# Altium PCB PCB1.PcbDoc
Units mm, origin at the board's own origin, x right, y up, seen from the top; angles counter-clockwise.
Board outline 38.74 x 49.78 mm, 2 copper layers (Top Layer, Bottom Layer); 37 components, 37 nets, 175 pads, 45 vias.
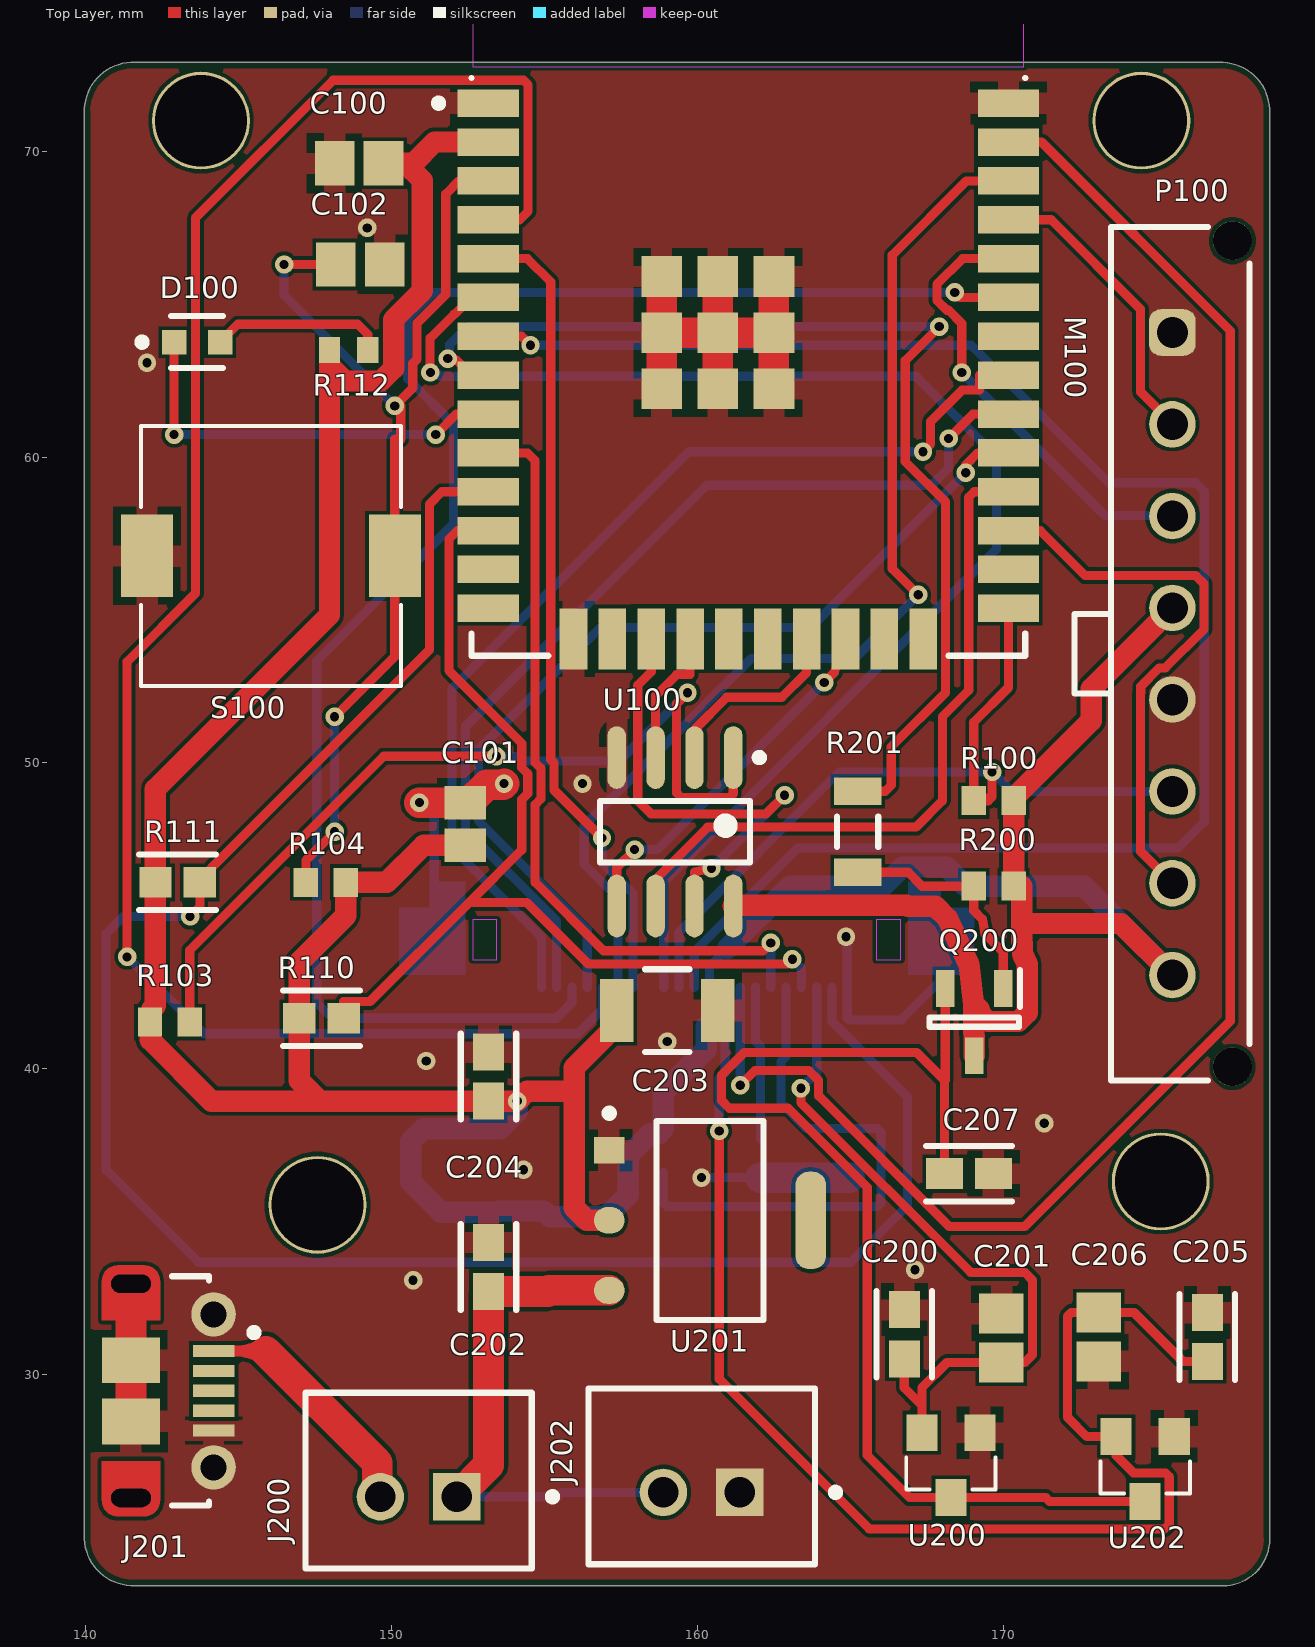
[diagram p0: Top Layer view]
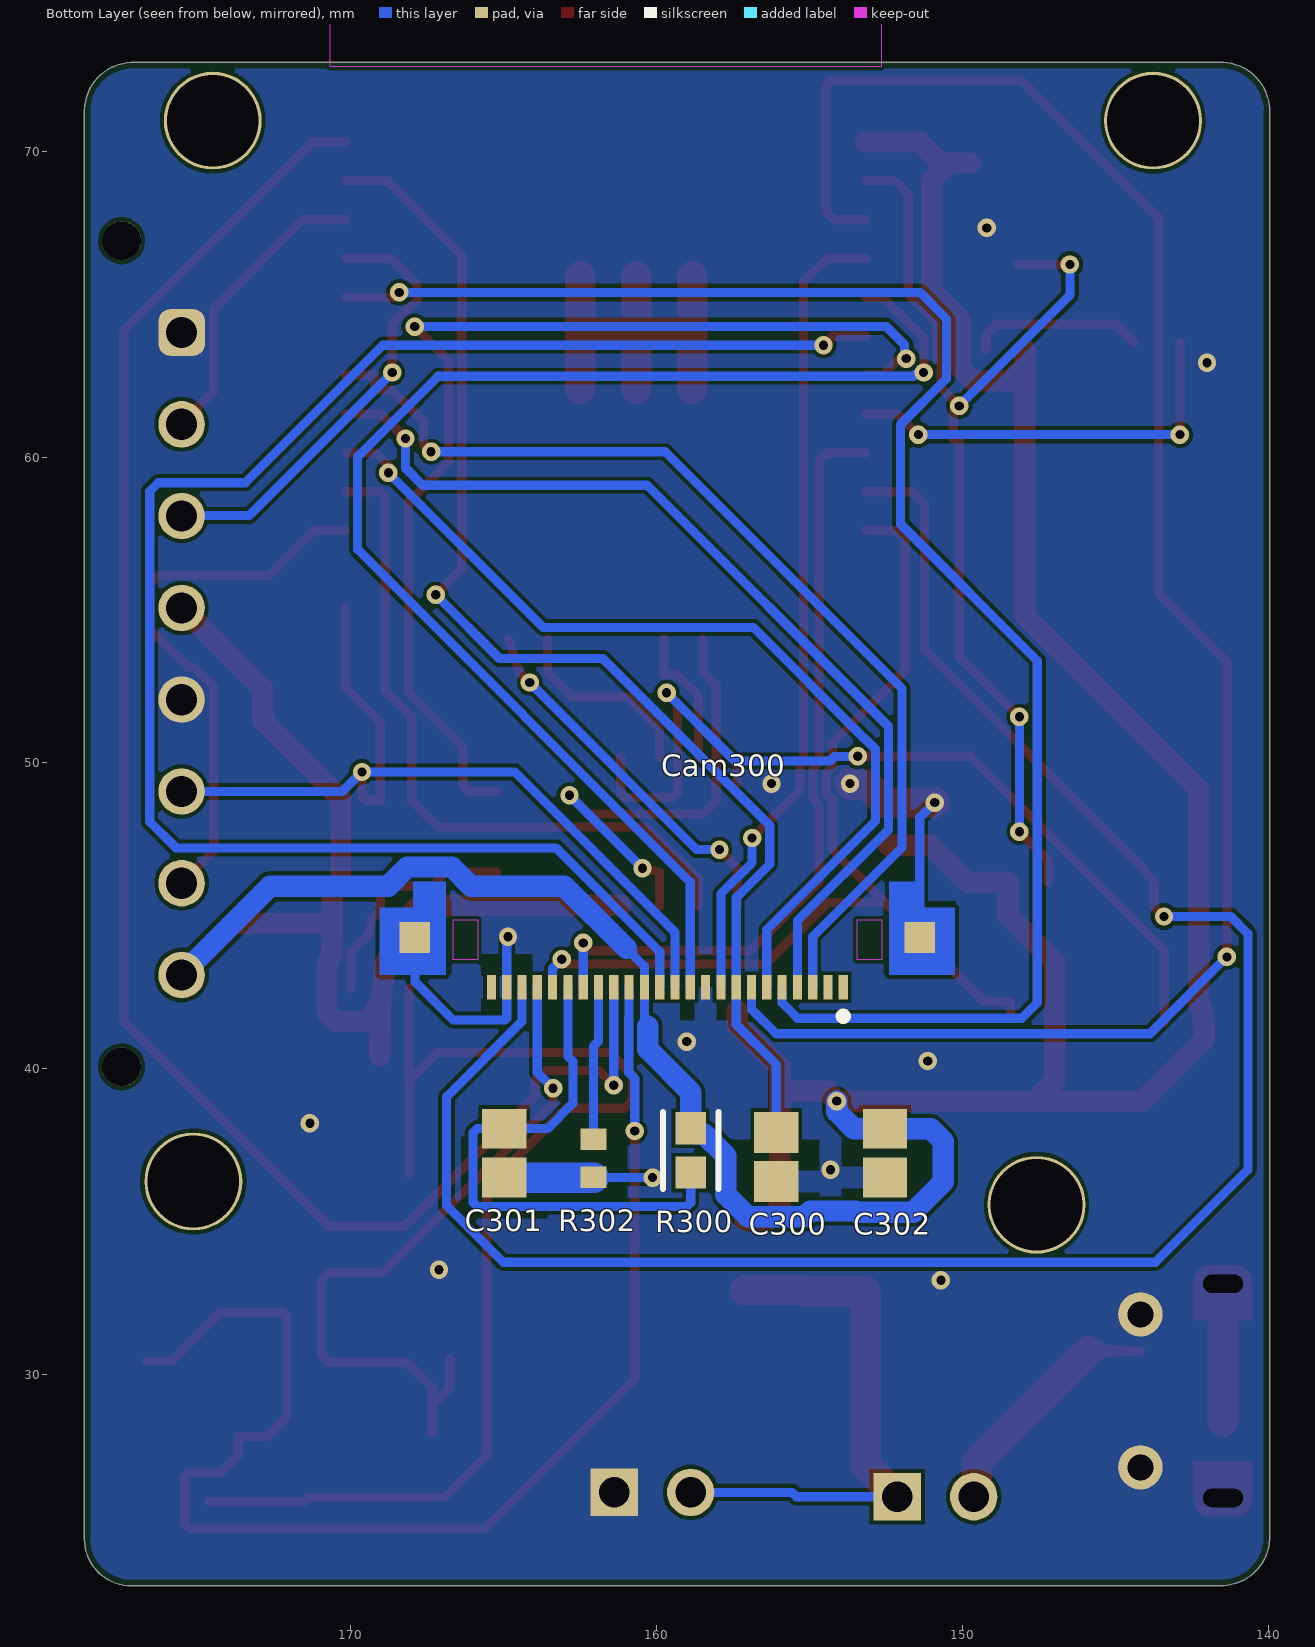
[diagram p1: Bottom Layer view, seen from below]
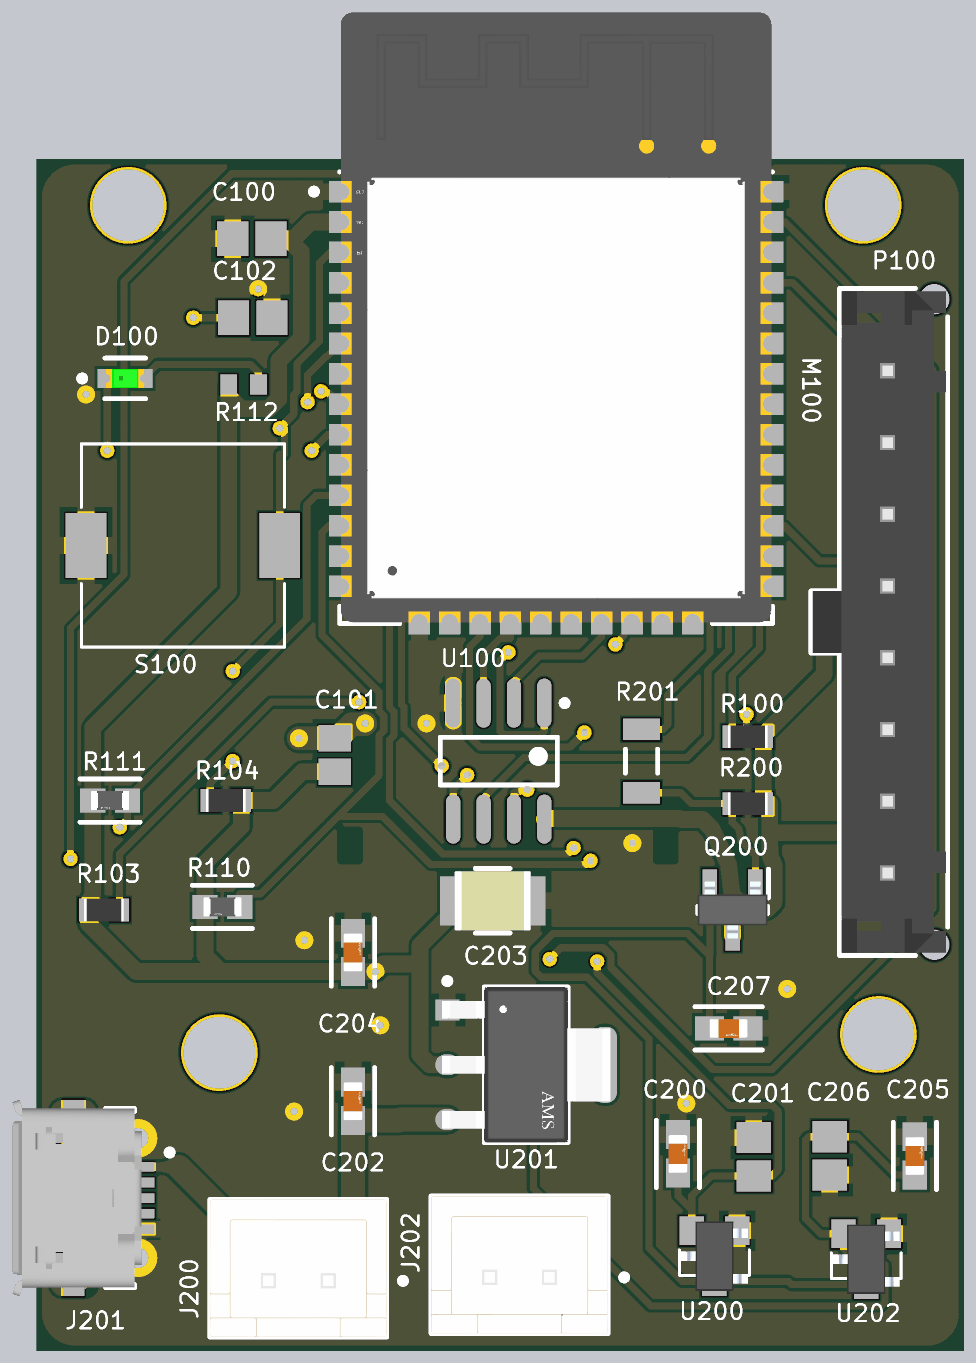
[diagram p2: 3D render of the assembled board from above, using the file's embedded part models]

## Layer stack, top to bottom
Top Solder: solder mask 0.0102, Solder Resist, Dk 3.5
Top Layer: signal copper 0.0356
Dielectric 1: dielectric 0.32, FR-4, Dk 4.8
Bottom Layer: signal copper 0.0356
Bottom Solder: solder mask 0.0102, Solder Resist, Dk 3.5

## Board outline
139.954,24.638 139.954,71.247 cw(c141.541,71.31) 141.478,72.898 177.038,72.898 cw(c177.101,71.31) 178.689,71.374 178.689,24.765 cw(c177.165,24.638) 177.292,23.114 141.605,23.114 cw(c141.541,24.701)

## Design rules (kind name [scope] priority, off if disabled: settings)
BoardOutlineClearance [All] p1: gap=0.2 ignorepadtopadclearanceinfootprint=FALSE
Clearance Clearance_3 [All] p1: gap=0.127 ignorepadtopadclearanceinfootprint=FALSE
Clearance Clearance_2 [All] p2: gap=0.254 ignorepadtopadclearanceinfootprint=FALSE
Clearance Clearance_1 [All] p3: gap=0.127 ignorepadtopadclearanceinfootprint=FALSE
Clearance [All] p4: gap=0.127 ignorepadtopadclearanceinfootprint=FALSE except(0.25: Arc-Hole Track-Hole SMDPad-Hole THPad-Hole Via-Hole Fill-Hole Poly-Hole Region-Hole Text-Hole)
ComponentClearance [All] p1: gap=0.127 collisioncheckmode=3 verticalgap=0.127 showdistances=TRUE
DiffPairsRouting [All] p1: maxlimit=0.254 minlimit=0.127 mostfreqgap=0.127 toplayer_minwidth=0.127 toplayer_maxwidth=25.4 toplayer_prefwidth=0.127 bottomlayer_minwidth=0.127 bottomlayer_maxwidth=25.4 bottomlayer_prefwidth=0.127 maxuncoupledlength=12.7
Height [All] p1: minheight=0 maxheight=1816.048 prefheight=12.7
HoleSize [All] p1: absolutevalues=TRUE maxlimit=6.3 minlimit=0.3 maxpercent=80.000 minpercent=20.000
HoleToHoleClearance [All] p1: gap=0.25 allowstackedmicrovias=FALSE
MinimumAnnularRing [All] p1: minimumring=0.076
MinimumSolderMaskSliver [All] p1: minsoldermaskwidth=0
PlaneClearance [All] p1: clearance=0.127
PlaneConnect PlaneConnectPowerPads [InPadClass('PowerPads')] p1: planeconnectstyle=Direct reliefexpansion=0.508 reliefentries=4 reliefconductorwidth=0.254 reliefairgap=0.254
PlaneConnect [All] p2: pad.planeconnectstyle=Relief pad.reliefexpansion=0.3 pad.reliefentries=4 pad.reliefconductorwidth=0.127 pad.reliefairgap=0.127 via.planeconnectstyle=Direct via.reliefexpansion=0.3 via.reliefentries=4 via.reliefconductorwidth=0.127 via.reliefairgap=0.127
PolygonConnect PolygonConnect_12 [All vs IsNamedPolygon('GND_L01_P002')] p1: thpad.connectstyle=Direct thpad.reliefconductorwidth=0.254 thpad.reliefentries=4 thpad.polygonreliefangle="90 Angle" thpad.airgapwidth=0.254 smdpad.connectstyle=Relief smdpad.reliefconductorwidth=0.7 smdpad.reliefentries=4 smdpad.polygonreliefangle="90 Angle" smdpad.airgapwidth=0.254 via.connectstyle=Direct via.reliefconductorwidth=0.254 via.reliefentries=4 via.polygonreliefangle="90 Angle" via.airgapwidth=0.254
PolygonConnect PolygonConnect_11 [All vs IsNamedPolygon('GND_L01_P002')] p2: thpad.connectstyle=Direct thpad.reliefconductorwidth=0.254 thpad.reliefentries=4 thpad.polygonreliefangle="90 Angle" thpad.airgapwidth=0.254 smdpad.connectstyle=Relief smdpad.reliefconductorwidth=0.7 smdpad.reliefentries=4 smdpad.polygonreliefangle="90 Angle" smdpad.airgapwidth=0.7 via.connectstyle=Direct via.reliefconductorwidth=0.254 via.reliefentries=4 via.polygonreliefangle="90 Angle" via.airgapwidth=0.254
PolygonConnect PolygonConnect_10 [All vs IsNamedPolygon('GND_L02_P003')] p3: thpad.connectstyle=Direct thpad.reliefconductorwidth=0.254 thpad.reliefentries=4 thpad.polygonreliefangle="90 Angle" thpad.airgapwidth=0.254 smdpad.connectstyle=Relief smdpad.reliefconductorwidth=0.7 smdpad.reliefentries=4 smdpad.polygonreliefangle="90 Angle" smdpad.airgapwidth=0.7 via.connectstyle=Direct via.reliefconductorwidth=0.254 via.reliefentries=4 via.polygonreliefangle="90 Angle" via.airgapwidth=0.254
PolygonConnect PolygonConnect_9 [All vs IsNamedPolygon('GND_L01_P002')] p4: thpad.connectstyle=Direct thpad.reliefconductorwidth=0.254 thpad.reliefentries=4 thpad.polygonreliefangle="90 Angle" thpad.airgapwidth=0.254 smdpad.connectstyle=Relief smdpad.reliefconductorwidth=0.254 smdpad.reliefentries=4 smdpad.polygonreliefangle="90 Angle" smdpad.airgapwidth=0.254 via.connectstyle=Direct via.reliefconductorwidth=0.254 via.reliefentries=4 via.polygonreliefangle="90 Angle" via.airgapwidth=0.254
PolygonConnect PolygonConnect_8 [All vs IsNamedPolygon('GND_L02_P003')] p5: thpad.connectstyle=Direct thpad.reliefconductorwidth=0.254 thpad.reliefentries=4 thpad.polygonreliefangle="90 Angle" thpad.airgapwidth=0.254 smdpad.connectstyle=Relief smdpad.reliefconductorwidth=0.254 smdpad.reliefentries=4 smdpad.polygonreliefangle="90 Angle" smdpad.airgapwidth=0.254 via.connectstyle=Relief via.reliefconductorwidth=0.254 via.reliefentries=4 via.polygonreliefangle="90 Angle" via.airgapwidth=0.254
PolygonConnect PolygonConnect_7 [All vs IsNamedPolygon('GND_L01_P002')] p6: thpad.connectstyle=Direct thpad.reliefconductorwidth=0.254 thpad.reliefentries=4 thpad.polygonreliefangle="90 Angle" thpad.airgapwidth=0.254 smdpad.connectstyle=Relief smdpad.reliefconductorwidth=0.254 smdpad.reliefentries=4 smdpad.polygonreliefangle="90 Angle" smdpad.airgapwidth=0.254 via.connectstyle=Relief via.reliefconductorwidth=0.254 via.reliefentries=4 via.polygonreliefangle="90 Angle" via.airgapwidth=0.254
PolygonConnect PolygonConnect_6 [All vs IsNamedPolygon('GND_L02_P003')] p7: thpad.connectstyle=Relief thpad.reliefconductorwidth=0.254 thpad.reliefentries=4 thpad.polygonreliefangle="90 Angle" thpad.airgapwidth=0.254 smdpad.connectstyle=Relief smdpad.reliefconductorwidth=0.7 smdpad.reliefentries=4 smdpad.polygonreliefangle="90 Angle" smdpad.airgapwidth=0.254 via.connectstyle=Relief via.reliefconductorwidth=0.254 via.reliefentries=4 via.polygonreliefangle="90 Angle" via.airgapwidth=0.254
PolygonConnect PolygonConnect_5 [All vs IsNamedPolygon('GND_L02_P003')] p8: thpad.connectstyle=Direct thpad.reliefconductorwidth=0.254 thpad.reliefentries=4 thpad.polygonreliefangle="90 Angle" thpad.airgapwidth=0.254 smdpad.connectstyle=Relief smdpad.reliefconductorwidth=0.254 smdpad.reliefentries=4 smdpad.polygonreliefangle="90 Angle" smdpad.airgapwidth=0.254 via.connectstyle=Relief via.reliefconductorwidth=0.254 via.reliefentries=4 via.polygonreliefangle="90 Angle" via.airgapwidth=0.254
PolygonConnect PolygonConnect_4 [All vs IsNamedPolygon('GND_L02_P003')] p9: thpad.connectstyle=Relief thpad.reliefconductorwidth=0.254 thpad.reliefentries=4 thpad.polygonreliefangle="90 Angle" thpad.airgapwidth=0.254 smdpad.connectstyle=Relief smdpad.reliefconductorwidth=0.7 smdpad.reliefentries=4 smdpad.polygonreliefangle="90 Angle" smdpad.airgapwidth=0.254 via.connectstyle=Relief via.reliefconductorwidth=0.254 via.reliefentries=4 via.polygonreliefangle="90 Angle" via.airgapwidth=0.7
PolygonConnect PolygonConnect_3 [All vs IsNamedPolygon('GND_L02_P003')] p10: thpad.connectstyle=Relief thpad.reliefconductorwidth=0.7 thpad.reliefentries=4 thpad.polygonreliefangle="90 Angle" thpad.airgapwidth=0.7 smdpad.connectstyle=Relief smdpad.reliefconductorwidth=0.7 smdpad.reliefentries=4 smdpad.polygonreliefangle="90 Angle" smdpad.airgapwidth=0.7 via.connectstyle=Relief via.reliefconductorwidth=0.254 via.reliefentries=4 via.polygonreliefangle="90 Angle" via.airgapwidth=0.254
PolygonConnect PolygonConnect_2 [All vs IsNamedPolygon('GND_L01_P002')] p11: thpad.connectstyle=Relief thpad.reliefconductorwidth=0.7 thpad.reliefentries=4 thpad.polygonreliefangle="90 Angle" thpad.airgapwidth=0.7 smdpad.connectstyle=Relief smdpad.reliefconductorwidth=0.7 smdpad.reliefentries=4 smdpad.polygonreliefangle="90 Angle" smdpad.airgapwidth=0.7 via.connectstyle=Relief via.reliefconductorwidth=0.254 via.reliefentries=4 via.polygonreliefangle="90 Angle" via.airgapwidth=0.254
PolygonConnect PolygonConnect_1 [All vs IsNamedPolygon('GND_L01_P002')] p12: thpad.connectstyle=Relief thpad.reliefconductorwidth=0.254 thpad.reliefentries=4 thpad.polygonreliefangle="90 Angle" thpad.airgapwidth=0.254 smdpad.connectstyle=Relief smdpad.reliefconductorwidth=0.7 smdpad.reliefentries=4 smdpad.polygonreliefangle="90 Angle" smdpad.airgapwidth=0.254 via.connectstyle=Relief via.reliefconductorwidth=0.254 via.reliefentries=4 via.polygonreliefangle="90 Angle" via.airgapwidth=0.254
PolygonConnect PolygonConnectPowerPads [All vs (InPadClass('PowerPads'))] p13: connectstyle=Direct reliefconductorwidth=0.254 reliefentries=4 polygonreliefangle="90 Angle" airgapwidth=0.254
PolygonConnect [All] p14: thpad.connectstyle=Relief thpad.reliefconductorwidth=0.127 thpad.reliefentries=4 thpad.polygonreliefangle="90 Angle" thpad.airgapwidth=0.127 smdpad.connectstyle=Relief smdpad.reliefconductorwidth=0.127 smdpad.reliefentries=4 smdpad.polygonreliefangle="90 Angle" smdpad.airgapwidth=0.127 via.connectstyle=Direct via.reliefconductorwidth=0.127 via.reliefentries=4 via.polygonreliefangle="90 Angle" via.airgapwidth=0.127
RoutingVias [All] p1: holewidth=0.3 width=0.6 viastyle="Through Hole" minholewidth=0.3 minwidth=0.6 maxholewidth=0.6 maxwidth=6.6
SilkToSilkClearance [All] p1: silktosilkclearance=0
SilkToSolderMaskClearance [IsPad] p1: minsilkscreentomaskgap=0.127 clearancetoexposedcopper=TRUE
SolderMaskExpansion [All] p1: expansion=0.075 istentingtop=FALSE
Width [All] p1: maxlimit=1 minlimit=0.127 preferedwidth=0.3
20 further rules are at their usual default settings.

## Classes and differential pairs
component class U_Power_Supply: C200 C201 C202 C203 C204 C205 C206 C207 J200 J201 J202 Q200 R200 R201 U200 U201 U202
component class U_MCU: C100 C101 C102 D100 K100 LED100 LED101 P100 R100 R103 R104 R110 R111 R112 S100 U100
component class U_Camera: C300 C301 C302 Cam300 R300 R301 R302

## Components (designator, comment, footprint, x,y, rotation, side; value= is the part's Value field where it differs from the comment)
C100 "08055C104K4Z2A" CAPC2013X140X50NL20T25 148.933,69.596 r0 top
C101 "C0805C105K4PACTU" CAPC2013X145X50LL20T25 152.4,48.006 r270 top
C102 "08055C104K4Z2A" CAPC2013X140X50NL20T25 148.971,66.294 r180 top
C200 "GRM188R60J106ME47D" FP-GRM188-0_1-e0_2_0_55-IPC_A 166.751,31.329 r90 top
C201 "08055C104K4Z2A" CAPC2013X140X50NL20T25 169.926,31.204 r270 top
C202 "GRM188R60J106ME47D" FP-GRM188-0_1-e0_2_0_55-IPC_A 153.162,33.528 r90 top
C203 "GRM32ER60J107ME20L" FP-GRM32-0_3-MFG 159.004,41.91 r0 top value=100uF
C204 "GRM188R60J106ME47D" FP-GRM188-0_1-e0_2_0_55-IPC_A 153.162,39.751 r90 top
C205 "GRM188R60J106ME47D" FP-GRM188-0_1-e0_2_0_55-IPC_A 176.657,31.242 r90 top
C206 "08055C104K4Z2A" CAPC2013X140X50NL20T25 173.101,31.242 r90 top
C207 "GRM188R60J106ME47D" FP-GRM188-0_1-e0_2_0_55-IPC_A 168.87,36.576 r0 top
C300 "08052U150GAT2A" CAPC2013X115X51NL20T26 156.083,37.122 r270 bottom
C301 "08055C104K4Z2A" CAPC2013X140X50NL20T25 164.973,37.249 r90 bottom
C302 "08055C104K4Z2A" CAPC2013X140X50NL20T25 152.527,37.249 r90 bottom
Cam300 "Cam-connector" MOLX-52435-2471 159.639,43.434 r0 bottom
D100 "LTST-C190GKT" FP-LTST-C190GKT-MFG 143.637,63.754 r0 top
J200 "B2B-XH-A(LF)(SN)" FP-B2B-XH-A_LF_SN-MFG 150.876,26.543 r180 top
J201 "105017-0001" USB-MICRO-B_V 142.828,29.48 r270 top
J202 "B2B-XH-A(LF)(SN)" FP-B2B-XH-A_LF_SN-MFG 160.127,26.687 r180 top
M100 "ESP32-WROOM-32" FP-ESP32-WROOM-32-MFG 161.655,66.305 r0 top
P100 "Header 8" 66200811122 175.769,53.57 r90 top
Q200 "FDN340P" SOT95P237X112-3N 169.037,41.529 r270 top
R100 "CRCW060310K0FKEA" RESC1609X50X30NL8T20 169.672,48.768 r0 top
R103 "CRCW060310K0FKEA" RESC1609X50X30NL8T20 142.748,41.529 r180 top
R104 "CRCW060310K0FKEA" RESC1609X50X30NL8T20 147.843,46.101 r0 top
R110 "ERA-3AEB472V" FP-ERA3A-IPC_B 147.701,41.656 r180 top
R111 "ERA-3AEB472V" FP-ERA3A-IPC_B 143.002,46.101 r180 top
R112 "ERJ-3EKF1001V" RESC1608X55X30LL15T15 148.59,63.5 r0 top
R200 "CRCW060310K0FKEA" RESC1609X50X30NL8T20 169.672,45.974 r0 top
R201 "ERJ-8ENF1001V" RESC3216X70X50LL05T20 165.227,47.752 r270 top
R300 "ERA-3AEB472V" FP-ERA3A-IPC_B 158.877,37.338 r90 bottom
R302 "ERJ-3EKF1001V" RESC1608X55X30LL15T15 162.052,37.084 r270 bottom
S100 "SKSTACE010" SW_SKSTACE010 146.05,56.769 r0 top value=RST
U100 "PSRAM" MCHP-SOIC-SN8_N 159.258,47.752 r270 top
U200 "PMIC-LDO-XC6206P332MR-G(SOT23)" SOT-23 168.275,27.051 r180 top
U201 "AMS1117-3.3" FP-AMS1117-IPC_C 160.401,35.052 r0 top
U202 "PMIC-LDO-XC6206P332MR-G(SOT23)" SOT-23 174.625,26.924 r180 top

## Footprints (in the part's own frame and the unit in brackets; to place one, negate y for a bottom-side part, rotate by r counter-clockwise, add the part's x,y. Pads: shape width x height; smd on the part's side, far side on the other; paste and mask are expansions set on the pad)
66200811122 [mm] "3.00mm Male Single Row Vertical Header, 8p"
  rrect50% 1.52x1.52 hole 1.02: 1(10.5,0.255)
  round 1.52 hole 1.02: 2(7.5,0.255) 3(4.5,0.255) 4(1.5,0.255) 5(-1.5,0.255) 6(-4.5,0.255) 7(-7.5,0.255) 8(-10.5,0.255)
  round 1.27 hole 1.27 unplated: MH1(-13.5,-1.705) MH2(13.5,-1.705)
  silkscreen extent -13.95,-2.26 13.95,3.46, body extent -13.82,-2.19 13.83,3.38, height 9.93
CAPC2013X115X51NL20T26 [mm] "Chip Capacitor, 2-Leads, Body 2.01x1.25mm, IPC Medium Density"
  rect 1.35x1.45 smd: 1(-0.8,0) 2(0.8,0)
  body extent -1.11,-0.72 1.1,0.72, height 1.15
CAPC2013X140X50NL20T25 [mm] "Chip Capacitor, 2-Leads, Body 2.00x1.25mm, IPC Medium Density"
  rect 1.3x1.45 smd: 1(-0.8,0) 2(0.8,0)
  body extent -1.1,-0.72 1.1,0.72, height 1.4
CAPC2013X145X50LL20T25 [mm] "Chip Capacitor, 2-Leads, Body 2.00x1.25mm, IPC High Density"
  rect 1.1x1.35 smd: 1(-0.7,0) 2(0.7,0)
  body extent -1.1,-0.72 1.1,0.72, height 1.45
FP-AMS1117-IPC_C [mm]
  rect 1.004x0.872 smd paste+0 mask+0: 1(-3.295,2.29)
  rrect100% 1.004x0.872 smd paste+0 mask+0: 2(-3.295,0) 3(-3.295,-2.29)
  rrect87% 1.004x3.182 smd paste+0 mask+0: 4(3.295,0)
  silkscreen extent -3.42,-3.25 1.75,3.62, body extent -3.9,-3.35 3.9,3.35, height 0.25
FP-B2B-XH-A_LF_SN-MFG [mm]
  rect 1.55x1.55 hole 1 paste-2539.97 mask+0: 1(-1.25,0.525)
  round 1.55 hole 1 paste-2539.97 mask+0: 2(1.25,0.525)
  silkscreen extent -4.5,-2.88 3.7,2.87, body extent -3.8,-2.98 3.8,2.98, height 0.25
FP-ERA3A-IPC_B [mm]
  rect 1.055x1.006 smd paste+0 mask+0: 1(-0.726,0) 2(0.726,0)
  silkscreen extent -1.25,-0.9 1.25,0.9, body extent -1.5,-0.75 1.5,0.75, height 0.25
FP-ESP32-WROOM-32-MFG [mm]
  rect 2x0.9 smd paste+0 mask+0: 1(-8.5,5.26) 2(-8.5,3.99) 3(-8.5,2.72) 4(-8.5,1.45) 5(-8.5,0.18) 6(-8.5,-1.09) 7(-8.5,-2.36) 8(-8.5,-3.63) 9(-8.5,-4.9) 10(-8.5,-6.17) 11(-8.5,-7.44) 12(-8.5,-8.71) 13(-8.5,-9.98) 14(-8.5,-11.25) 25(8.5,-11.25) 26(8.5,-9.98) 27(8.5,-8.71) 28(8.5,-7.44) 29(8.5,-6.17) 30(8.5,-4.9) 31(8.5,-3.63) 32(8.5,-2.36) 33(8.5,-1.09) 34(8.5,0.18) 35(8.5,1.45) 36(8.5,2.72) 37(8.5,3.99) 38(8.5,5.26)
  rect 0.9x2 smd paste+0 mask+0: 15(-5.715,-12.25) 16(-4.445,-12.25) 17(-3.175,-12.25) 18(-1.905,-12.25) 19(-0.635,-12.25) 20(0.635,-12.25) 21(1.905,-12.25) 22(3.175,-12.25) 23(4.445,-12.25) 24(5.715,-12.25)
  rect 1.33x1.33 smd paste+0 mask+0: 39(-2.835,-4.075) 39(-2.835,-2.24) 39(-2.835,-0.405) 39(-1,-4.075) 39(-1,-2.24) 39(-1,-0.405) 39(0.835,-4.075) 39(0.835,-2.24) 39(0.835,-0.405)
  Keep-Out Layer region: -9,6.45 9,6.45 9,12.75 -9,12.75
  Keep-Out Layer region: -9,6.45 9,6.45 9,12.75 -9,12.75
  silkscreen extent -10.25,-12.8 9.05,6.08, body extent -9.6,-13.35 9.6,12.9, height 0.25
FP-GRM32-0_3-MFG [mm]
  rect 1.1x2.05 smd paste+0 mask+0: 1(-1.65,0) 2(1.65,0)
  silkscreen extent -0.73,-1.35 0.73,1.35, body extent -2.3,-1.45 2.3,1.45, height 0.25
FP-GRM188-0_1-e0_2_0_55-IPC_A [mm]
  rect 1.208x1.012 smd paste+0 mask+0: 1(-0.802,0) 2(0.802,0)
  silkscreen extent -1.41,-0.91 1.41,0.91, body extent -1.91,-1.01 1.91,1.01, height 0.25
FP-LTST-C190GKT-MFG [mm]
  rect 0.8x0.8 smd paste+0 mask+0: 1(-0.75,0) 2(0.75,0)
  silkscreen extent -1.92,-0.85 0.85,0.85, body extent -1.25,-0.55 1.25,0.55, height 0.25
MCHP-SOIC-SN8_N [mm] "SOIC, 8-Leads, Body 4.9x3.9mm, Pitch 1.27mm, IPC Medium Density"
  oval 2.05x0.6 smd: 1(-2.425,1.905) 2(-2.425,0.635) 3(-2.425,-0.635) 4(-2.425,-1.905) 5(2.425,-1.905) 6(2.425,-0.635) 7(2.425,0.635) 8(2.425,1.905)
  silkscreen extent -2.55,-2.45 1,2.88, body extent -1.95,-2.45 1.95,2.45, height 1.75
MOLX-52435-2471 [mm] "FPC Connector, 24-Leads, Right Angle, Pitch 0.5 mm, Mated Height 2.0 mm, SMT"
  rect 0.3x0.8 smd: 1(-5.75,0.762) 2(-5.25,0.762) 3(-4.75,0.762) 4(-4.25,0.762) 5(-3.75,0.762) 6(-3.25,0.762) 7(-2.75,0.762) 8(-2.25,0.762) 9(-1.75,0.762) 10(-1.25,0.762) 11(-0.75,0.762) 12(-0.25,0.762) 13(0.25,0.762) 14(0.75,0.762) 15(1.25,0.762) 16(1.75,0.762) 17(2.25,0.762) 18(2.75,0.762) 19(3.25,0.762) 20(3.75,0.762) 21(4.25,0.762) 22(4.75,0.762) 23(5.25,0.762) 24(5.75,0.762)
  rect 1x1 smd: MP1(-8.25,-0.863) MP2(8.25,-0.863)
  Top Layer region: -7.244,0.362 -9.4,0.362 -9.4,-1.838 -8.3,-1.838 -8.3,-2.688 -7.244,-2.688
  Top Layer region: 7.239,0.362 9.4,0.362 9.4,-1.838 8.3,-1.838 8.3,-2.688 7.239,-2.688
  Keep-Out Layer region: -7,-0.137 -6.2,-0.137 -6.2,-1.438 -7,-1.438
  Keep-Out Layer region: 6.2,-0.137 7,-0.137 7,-1.438 6.2,-1.438
  silkscreen extent -5.87,1.59 -5.62,1.84, body extent -9.3,-5.74 9.3,0.86, height 2.05
RESC1608X55X30LL15T15 [mm] "Chip Resistor, 2-Leads, Body 1.60x0.80mm, IPC High Density"
  rect 0.7x0.85 smd: 1(-0.625,0) 2(0.625,0)
  body extent -0.87,-0.48 0.87,0.48, height 0.55
RESC1609X50X30NL8T20 [mm] "Chip Resistor, 2-Leads, Body 1.65x0.95mm, IPC Medium Density"
  rect 0.8x0.95 smd: 1(-0.65,0) 2(0.65,0)
  body extent -0.82,-0.48 0.82,0.48, height 0.5
RESC3216X70X50LL05T20 [mm] "Chip Resistor, 2-Leads, Body 3.20x1.60mm, IPC High Density"
  rect 0.9x1.55 smd: 1(-1.325,0) 2(1.325,0)
  silkscreen extent -0.5,-0.67 0.5,0.67, body extent -1.63,-0.82 1.62,0.82, height 0.7
SOT95P237X112-3N [mm]
  rect 1.2x0.6 smd: 1(-1.1,0.95) 2(-1.1,-0.95) 3(1.1,0)
  silkscreen extent -1.7,-1.46 0.15,1.5, body extent -1.18,-1.46 1.18,1.46, height 1.12
SOT-23 [mm]
  rect 1.016x1.2 smd: 1(-0.95,-1.06) 2(0.95,-1.06) 3(0,1.06)
  silkscreen extent -1.46,-0.25 1.46,0.8, body extent -1.4,-1.45 1.4,1.45, height 1.3
SW_SKSTACE010 [mm]
  rect 1.7x2.7 smd: 1(-4.05,0) 2(4.05,0)
  silkscreen extent -4.25,-4.25 4.25,4.25
USB-MICRO-B_V [mm] "USB, MICRO B, Body 7.491x4.695 mm, Pitch 0.65 mm"
  rect 0.4x1.35 smd: 1(-1.3,1.35) 2(-0.65,1.35) 3(0,1.35) 4(0.65,1.35) 5(1.3,1.35)
  round 1.45 hole 0.85: 6(-2.5,1.35) 7(2.5,1.35)
  rrect50% 0x0 hole 0.6 slot 1.3 at 90 deg: 8(-3.5,-1.35) 11(3.5,-1.35)
  rect 1.5x1.9 smd: 9(-1,-1.35) 10(1,-1.35)
  Top Layer circle w0.5: c3.6,-0.9 r0.25
  Top Layer region: -2.3,-2.3 -2.3,-0.4 -3.6,-0.4 -3.6,-2.3
  Top Layer region: 2.3,-0.4 2.3,-2.3 3.6,-2.3 3.6,-0.4
  Top Layer region: 3.6,-0.9 3.6,-1.8 4.1,-1.8 4.1,-0.9
  Top Layer region: -3.6,-1.8 -3.6,-0.9 -4.1,-0.9 -4.1,-1.8
  Top Layer lines w0.5: 3.6,-1.55 cw(c3.6,-1.8) 3.426,-1.979 cw(c3.6,-1.8) 3.6,-1.55 ; 3.6,-1.55 ccw(c3.6,-1.8) 3.6,-1.55 ; -3.6,-1.55 ccw(c-3.6,-1.8) -3.6,-1.55 ; -3.53,-1.14 ccw(c-3.6,-0.9) -3.5,-1.129 ccw(c-3.6,-0.9) -3.362,-0.977 ccw(c-3.6,-0.9) -3.355,-0.951 ccw(c-3.6,-0.9) -3.6,-0.65 ccw(c-3.6,-0.9) -3.53,-1.14
  silkscreen extent -3.75,-0.01 3.75,2.79, body extent -4.1,-3.9 4.1,1.5, height 2.67

## Part data
C100 C102 C201 C206 C301 C302: library part CMP-2007-04629-1, Manufacturer="AVX Interconnect / Elco", Parameter 1=0.1uf, Part Number=08055C104K4Z2A
C101: library part CMP-1036-04746-2, Manufacturer=Kemet, Parameter 1=1uF, Part Number=C0805C105K4PACTU
C200 C202 C204 C205 C207: library part CMP-2006-02792-2, "Chip Multilayer Ceramic Capacitors for General Purpose, 0603, 10uF, X5R, 15%, 20%, 6.3V", Capacitance=10uF, Case Code (Imperial)=0603, Case Code (Metric)=1608, Dielectric=X5R, Max Operating Temperature=85°C, Min Operating Temperature=-55°C, Package Quantity=4000, Tolerance=20%, Voltage=6.3V, Case/Package=0603, Depth=0.8mm, Height=0.8mm, Lead Free="Lead Free", Length=1.6mm, Material=Ceramic, Mount="Surface Mount", Packaging="Tape and Reel", Radiation Hardening=No, REACH SVHC="No SVHC", Termination=SMD/SMT, Thickness=0.035inch, Voltage Rating=6.3V, Voltage Rating (DC)=6.3V, Width=0.031inch
C203: library part CMP-2000-05259-2, "CAP CER 100UF 6.3V X5R 1210", 3DS Part Number=220-00002, Capacitance=100uF, Manufacturer=Murata, Package=GRM32-0.3, Temperature="-55°C to +85°C", Temperature Characteristic=X5R, Temperature Coefficient=15%, Temperature Range High=+85°C, Temperature Range Low=-55°C, Tolerance=20%, Voltage=6.3V, Automotive=No, Category=Cap, ComponentLink2Description=Datasheet, ComponentLink2URL=https://search.murata.co.jp/Ceramy/image/img/A01X/G101/ENG/GRM32ER60J107ME20-01.pdf, Device Class L1="Passive Components", Device Class L2=Capacitors, Device Class L3="Ceramic Capacitors", Digikey Description="CAP CER 100UF 6.3V X5R 1210", Height=2.7mm, Ipc Land Pattern Name=CAPC320250X250, Lead Free=Yes, Manufacturer Part Number=GRM32ER60J107ME20L, Material=Ceramic, Octopart=https://octopart.com/grm32er60j107me20l-murata-197007, RoHS=TRUE, Voltage Rating=6.3V
C300: library part CMP-2007-04886-1, Manufacturer="AVX Interconnect / Elco", Parameter 1=15pf, Part Number=08052U150GAT2A
Cam300: library part CMP-1241-00275-1, "0.5 mm Pitch Easy-On(TM) Type FPC Connector, 2.0 mm Mated Height, Right Angle, ZIF, SMT, Top Contact, 24 Circuits, -40 to 85 degC, ELV and RoHS Compliant, Tape and Reel", Current (Max per Contact)=0.5A, Manufacturer=Molex, PartNumber=52435-2471, Voltage (Max)="50V AC (RMS)/DC", Circuits (Loaded)=24, ComponentLink1Description="Manufacturer URL", ComponentLink1URL=http://www.molex.com/molex/index.jsp, ComponentLink2Description=Datasheet, ComponentLink2URL=http://www.molex.com/webdocs/datasheets/pdf/en-us/0524352471_FFC_FPC_CONNECTORS.pdf, ComponentLink3Description="Package Specification", ComponentLink3URL=http://www.molex.com/pdm_docs/sd/524352471_sd.pdf, Contact Position=Top, Durability (mating cycles max)=20, Entry Angle="90degrees Angle", Mated Height=2.00mm, Material - Metal="Phosphor Bronze", Material - Plating Mating=Gold, Material - Plating Termination=Gold, Mounting Technology="Surface Mount", Number of Rows=1, Orientation="Right Angle", PackageDescription="24-Lead FPC Connector, Pitch 0.5 mm", PackageReference=52435-2471, PackageVersion="Rev. D, 07/2010", Packing="Tape and Reel", PCB Locator=No, PCB Retention=Yes, Pitch - Mating Interface=0.50mm, Polarized to PCB=Yes, RoHS=TRUE, Stackable=No
D100: library part CMP-22017-000005-2, "LED GREEN CLEAR CHIP SMD", Case Code (Imperial)=0603, Case Code (Metric)=1608, Color=Green, Forward Current=30mA, Forward Voltage=2.1V, Lens Color=Colorless, Max Operating Temperature=85°C, Min Operating Temperature=-55°C, Package Quantity=1, Power Dissipation=100mW, Reverse Voltage=5V, Test Current=10mA, Voltage=2V, Case/Package=0603, Depth=0.8mm, Dominant Wavelength=569nm, Height=0.8mm, Illumination Color=Green, Lead Free="Lead Free", Length=1.6mm, Lens Style=Clear, Lens Transparency=Clear, Luminous Intensity=6mcd, Mount="Surface Mount", Number of Elements=1, Number of LEDs=1, Number of Pins=2, Packaging="Tape and Reel", Parameter 1=LED, Power Rating=100mW, Radiation Hardening=No, Viewing Angle=130°, Wavelength=565nm, Width=0.8mm
J200 J202: library part CMP-2000-05888-3, "CONN HEADER VERT 2POS 2.5MM", Color=Natural, Contact Resistance=20mR, Current Rating=3A, Housing Color=White, Insulation Resistance=1GR, Max Operating Temperature=85°C, Max Voltage Rating (AC)=250V, Min Operating Temperature=-25°C, Connector Type="Male Pin", Contact Material=Brass, Contact Plating=Tin, Contact Type="Male Pin", Depth=5.75mm, Fastening Type=Detent, Housing Material=Polyamide, Lead Free="Lead Free", Lead Pitch=2.5mm, Length=7.4mm, Max Current Rating=3A, Max Voltage Rating (DC)=250V, Mount="Through Hole", Number of Contacts=2, Number of Positions=2, Number of Rows=1, Orientation=Straight, Packaging=Bulk, Pitch=2.5mm, REACH SVHC="No SVHC", Series=XH, Termination=Solder, Voltage Rating=250V, Voltage Rating (AC)=250V, Wire/Cable Gauge=22AWG
  J200: Parameter 1=Switch
  J202: Parameter 1=Potentiometer
J201: library part CMP-2000-05827-1, "Micro-USB B Receptacle, Right Angle, Bottom Mount, Surface Mount, with Solder Tabs, -30 to 85 degC, 5-Pin USB, RoHS, Tape and Reel", Manufacturer=Molex, Package Description="5-Leads USB, Micro B, Body 7.5 x 5 mm, Pitch 0.65 mm", Package Reference=MICRO-B, Package Version="Rev. F, 12/2012", Standard Package=1, Voltage - Max=30V, 3D Model=105017-0001.stp, Catalog Drawings=1050170001, Category=Connectors,Interconnects, Circuits=5, Connector Type=USB-microB, Datasheet URL=http://www.molex.com/elqNow/elqRedir.htm?ref=http://www.molex.com/webdocs/datasheets/pdf/en-us/1050170001_IO_CONNECTORS.pdf, Datasheet Version=03/2016, Family=USB,DVI,HDMIConnectors, Featured Product=Micro-USBConnectorsUSBConnectors, Features=Shielded,SolderRetention, Gender=Receptacle, Ingress Protection=-, Manufacturer URL=http://www.molex.com/, Mating Products=WM17145-ND-CABLEMICROUSBBTOSTDA1.0MWM17147-ND-CABLEMICROUSBBTOSTDA2.0MWM17146-ND-CABLEMICROUSBBTOSTDA1.5M, Mounting Technology=SurfaceMount, Mounting Type=BoardCutout,SurfaceMount,RightAngle, Number of Contacts=5, Online Catalog=Molex-MicroUSB, Other Names=WM1399DKR, Package URL=http://www.molex.com/pdm_docs/sd/1050170001_sd.pdf, Packaging=Digi-Reel®, PCN Assembly/Origin=ResinSupplier21/Oct/2015, RoHS Information=1050170001CertofCompliance, Series=-, Specifications=-
M100: library part CMP-194065-000008-1, "RX TXRX MOD WIFI SURFACE MOUNT", Case/Package=SMD/SMT, Frequency=2.5GHz, Max Operating Temperature=85°C, Min Operating Temperature=-40°C, Operating Supply Voltage=3.6V, Package Quantity=550, Data Rate=150Mbps, Mount="Surface Mount", Packaging="Cut Tape", Sensitivity=-98dBm, Weight=0.088185oz
P100: library part CMP-1502-00446-2, Color=Black, Contact Resistance=10mΩ, Current Rating=5A, Insulation Resistance=1GΩ, Max Operating Temperature=105°C, Min Operating Temperature=-40°C, Operating Supply Voltage=250V, Connector Type="Male Pin, Socket", Contact Material=Copper, Contact Plating=Tin, Fastening Type=Ramp, Gender=Male, Height=11mm, Lead Pitch=3mm, Length=27.65mm, Mount="Through Hole", NexarPartId=23024701, Number of Contacts=8, Number of Pins=8, Number of Positions=8, Number of Rows=1, Orientation=Vertical, Pitch=3mm, REACH SVHC=Unknown, RoHS=Compliant, Termination="Kinked Pin", Width=27.65mm
Q200: "MOSFET (P-Channel)", Manufacturer_Name=onsemi, Mouser Part Number=512-FDN340P, Arrow Part Number=FDN340P, Arrow Price/Stock=https://www.arrow.com/en/products/fdn340p/on-semiconductor?region=nac, Datasheet Link=https://www.onsemi.com/pub/Collateral/FDN340P-D.PDF, Height=1.12mm, Manufacturer_Part_Number=FDN340P, Mouser Price/Stock=https://www.mouser.co.uk/ProductDetail/onsemi-Fairchild/FDN340P?qs=AMp2PTjoga9dhzFXRaqTZw%3D%3D, Parameter 1=PMOS
R100 R103 R104 R200: library part CMP-1666-00005-4, "Chip Resistor, 10 KOhm, +/- 1%, 100 mW, -55 to 155 degC, 0603 (1608 Metric), RoHS, Tape and Reel", Manufacturer="Vishay Semiconductor", Max Operating Temperature="155 degC", Min Operating Temperature="-55 degC", Package Quantity=5000, Voltage Rating="75 V", ComponentLink1Description="Manufacturer URL", ComponentLink1URL=http://www.vishay.com/, ComponentLink2Description=Datasheet, ComponentLink2URL=https://datasheet.ciiva.com/11809/0900766b80d98afc-11809037.pdf, DatasheetVersion=06/2012, Height="0.45 mm", Length="1.55 mm", Mounting Technology="Surface Mount", PackageDescription="2-Pin Surface Mount Device, Body 1.575 x 0.85 mm", PackageReference=0603, Packaging="Tape and Reel", Parameter 1=10k, REACH SVHC=Unknown, RoHSCompliant=true
R110 R111 R300: library part CMP-2000-00072-2, "RES SMD 4.7K OHM 0.1% 1/10W 0603", Case Code (Imperial)=0603, Case Code (Metric)=1608, Max Operating Temperature=155°C, Max Power Dissipation=100mW, Min Operating Temperature=-55°C, Package Quantity=5000, Resistance=4.7kR, Resistance Tolerance=0.1%, Resistor Type="Thin Film", Temperature Coefficient=25ppm/°C, Voltage Rating=75V, Case/Package=0603, Construction=Rectangular, Contact Plating=Tin, Depth=0.8mm, Height=0.45mm, Lead Free="Lead Free", Length=1.6mm, Military Standard=Not, Mount="Surface Mount", Number of Pins=2, Number of Terminations=2, Packaging="Tape and Reel", Power Rating=100mW, Radiation Hardening=No, REACH SVHC="No SVHC", RoHS Compliant=Yes, Series=ERA-3A, Technology="THIN FILM", Termination=SMD/SMT, Tolerance=0.1%, Voltage Rating (DC)=75V, Width=0.8mm, Working Voltage=75V
R112 R302: library part CMP-2000-00180-1, Manufacturer=Panasonic, Parameter 1=1k, Part Number=ERJ-3EKF1001V
R201: library part CMP-2003-00017-1, Manufacturer=Panasonic, Parameter 1=1k, Part Number=ERJ-8ENF1001V
S100: "Switch Tactile N.O. SPST Round Button J-Bend 0.05A 16VDC 500000Cycles 4N SMD T/R", Package=None, Availability=Unavailable, MP=SKSTACE010, Price=None
U100: library part CMP-0163-00041-1, "512K bits SPI Serial SRAM with SDI and SQI Interface, 2.5 to 5.5 V, 20 MHz, -40 to 85 degC, 8-pin SOIC (SN8), Tube", Manufacturer=Microchip, PartNumber=23LC512-I/SN, ComponentLink1Description="Manufacturer URL", ComponentLink1URL=http://www.microchip.com, ComponentLink2Description=Datasheet, ComponentLink2URL=http://ww1.microchip.com/downloads/en/DeviceDoc/25155A.pdf, ComponentLink3Description="Package Specification", ComponentLink3URL=http://www.microchip.com/stellent/groups/techpub_sg/documents/packagingspec/en012702.pdf, ComponentLink4Description="Product URL", ComponentLink4URL=http://www.microchip.com/23LC512, DatasheetVersion="Rev. A", Mounting Technology="Surface Mount", PackageDescription="8-Lead Plastic Small Outline, 4.9 x 3.9 mm Body, 1.27 mm Pitch", PackageReference=SOIC-SN8, PackageVersion=C04-057C
U200 U202: "Linear Voltage Regulator IC Positive Fixed 1 Output 200mA SOT-23", Package="SOT-23-3 Torex", Availability="In Stock", Check_prices=https://www.snapeda.com/parts/XC6206P332MR-G/Torex/view-part/?ref=eda, MF=Torex, MP=XC6206P332MR-G, Price=None, Purchase-URL=https://pricing.snapeda.com/search/part/XC6206P332MR-G/?ref=eda, SnapEDA_Link=https://www.snapeda.com/parts/XC6206P332MR-G/Torex/view-part/?ref=snap
  U200: Parameter 1=XC6206-2.8V
  U202: Parameter 1=XC6206-1.2V
U201: library part CMP-209535-000001-1, "LDO Voltage Regulators 1A, 3.3V", Dropout Voltage=1.1V, Manufacturer="Advanced Monolithic Systems", Max Junction Temp=+125°C, Max Power Dissipation=1.2W, Max Supply Voltage=15V, Nominal Supply Current=5mA, Output Current=1A, Output Voltage=3.3V, Package=AMS1117, Temperature="-40°C to +125°C", Temperature Range Low=-40°C, Automotive=No, Category=IC, ComponentLink2Description=Datasheet, ComponentLink2URL=http://www.advanced-monolithic.com/pdf/ds1117.pdf, Device Class L1="Integrated Circuits (ICs)", Device Class L2="Power Management ICs", Device Class L3="Voltage Regulators - Linear", Height=1.8mm, Ipc Land Pattern Name=SOT229P700X180-4, Lead Free=Yes, Manufacturer Part Number=AMS1117-3.3, Number of Outputs=1, Octopart=https://octopart.com/ams1117-3.3-advanced+monolithic+systems-25899300, Output Type=Fixed, RoHS=TRUE, Standoff Height=0.64mm, Temperature Range High=+125°C

## Free pads (board coordinates)
  round 3.2 hole 3: 13(143.764,70.993) 14(147.574,35.56) 15(175.133,36.322) 16(174.498,70.993)

## Via types
v1: diameter 0.6, hole 0.3, Top Layer to Bottom Layer, 45 vias

## Nets (pads, with @x,y where several pads share a name; then routed paths per layer and width w, separated by ;. In a path a pad name is that pad's centre, name@x,y a point inside that pad or via, vN(x,y) a via of type N, cw(c..) or ccw(c..) an arc to the next point about the centre after c; other vN are vias at no path point)
3V3: C100.2 C101.2 C203.1 C204.1 C302.2 Cam300.14 M100.2 P100.4 P100.8 Q200.3 R100.2 R103.2 R104.2 R110.2 R111.2 R112.1 R200.2 R300.2 U100.8 U201.2 | length 149.3
  Top Layer w0.7: R112.1 147.965,62.992 ; C100.2 150.444,69.596 ; C101.2 151.04,47.306 149.835,46.101 R104.2 148.493,45.009 146.975,43.491 R110.2 146.975,39.624 147.65,38.949 ; M100.2 151.397,70.295 150.698,69.596 150.444,69.596 ; U201.2 156.374,35.052 155.964,35.462 155.964,39.267 ; C203.1 157.354,41.435 155.964,40.045 155.964,39.267 ; U100.8 161.184,45.349 166.837,45.349 166.871,45.314 167.767,45.314 168.177,44.904 168.864,43.427 169.013,42.137 ; Q200.3 169.018,41.829 169.013,42.137 ; P100.8 173.829,44.755 170.586,44.755 ; P100.4@175.514,55.087 P100.4 172.865,52.421 172.865,51.386 170.322,48.843 R200.2 170.586,45.974 170.586,44.755 ; 147.65,38.949 C204.1 v1(154.102,38.949) 154.42,39.267 155.964,39.267 ; 147.65,38.949 144.109,38.949 142.098,40.96 R103.2 142.148,41.579 142.148,41.936 142.276,42.064 R111.2 142.276,49.149 147.965,54.838 147.965,62.992 ; 147.965,62.992 148.473,62.484 149.649,62.484 150.059,62.894 150.059,64.492 151.003,65.436 151.003,69.037 150.444,69.596 ; 169.013,42.137 169.21,41.94 169.21,41.831 169.489,41.552 170.485,41.552 170.764,41.831 170.764,43.427 170.614,43.765 170.614,44.075 170.586,44.175 170.586,44.755
  Bottom Layer w0.3: 160.389,41.517 160.389,43.358 160.782,43.751 160.782,43.942
  Bottom Layer w0.7: v1(154.102,38.949) 154.102,38.608 153.543,38.049 151.032,38.049 150.622,37.639 150.622,36.304 151.604,35.322 153.45,35.322 153.484,35.357 154.974,35.357 155.16,35.17 157.006,35.17 157.726,35.89 157.726,37.166 158.446,37.886 158.724,37.886 158.877,38.039 158.877,39.243 160.274,40.64 160.274,41.402 ; 160.973,43.942 163.005,45.974 166.055,45.974 166.68,46.599 168.137,46.599 168.762,45.974 172.627,45.974 P100.8@175.514,43.087
+5V: C202.1 J200.1 J202.2 U201.3 | length 17.9
  Top Layer w1: J200.1 153.162,27.054 C202.1 155.092,32.726 155.128,32.762 U201.3
  Bottom Layer w0.3: J200.1 155.423,26.018 155.567,26.162 J202.2
"CAM RST": C301.2 Cam300.19 R300.1 | length 18
  Bottom Layer w0.3: R300.1 158.877,35.636 159.004,35.509 165.862,35.509 165.989,35.636 165.989,37.922 165.862,38.049 C301.2 163.551,38.049 162.726,38.874 162.726,40.248 162.889,40.411 Cam300.19
"CSI D4": Cam300.7 M100.4 | length 61.1
  Top Layer w0.3: v1(141.351,43.663) 141.351,53.315 143.586,55.55 143.586,67.818 148.082,72.314 154.305,72.314 154.457,72.161 154.457,68.034 154.178,67.755 M100.4
  Bottom Layer w0.3: v1(141.351,43.663) 143.866,41.148 156.083,41.148 156.889,41.954 Cam300.7
"CSI D5": Cam300.9 M100.5 | length 26.5
  Top Layer w0.3: M100.5 154.432,66.485 155.194,65.723 155.194,50.109 155.301,50.002 155.301,49.118 v1(156.87,47.549)
  Bottom Layer w0.3: v1(156.87,47.549) 156.87,46.741 157.889,45.722 Cam300.9
"CSI MCLK": Cam300.12 M100.25 P100.6 R100.1 | length 29.2
  Top Layer w0.3: v1(169.621,49.708) 169.621,48.895 ; M100.25 170.155,52.466 169.022,51.333 R100.1 ; R100.1 169.494,48.768 169.621,48.895 ; R100.1 169.621,48.895
  Bottom Layer w0.3: Cam300.12 159.389,44.471 164.626,49.708 v1(169.621,49.708) 170.259,49.07 P100.6@175.54,49.07
CSI_1.2V: C205.1 C206.2 Cam300.15 U202.2 | length 44.3
  Top Layer w0.3: v1(160.706,37.973) 160.706,29.87 165.608,24.968 175.26,24.968 175.412,25.121 175.412,26.67 175.285,26.797 174.244,26.797 173.675,27.366 U202.2 172.72,27.984 172.085,28.619 172.085,31.915 172.212,32.042 C206.2 174.257,32.042 175.859,30.44 C205.1
  Bottom Layer w0.3: v1(160.706,37.973) 160.706,39.688 160.901,39.883 160.901,41.662 160.889,41.674 Cam300.15
CSI_2.8V: C200.1 C201.2 Cam300.21 U200.2 | length 23.7
  Top Layer w0.3: v1(163.373,39.37) 163.373,38.901 168.924,33.35 170.688,33.35 170.942,33.096 170.942,30.658 170.688,30.404 C201.2 168.148,30.404 167.325,29.581 167.325,29.007 ; C200.1 166.751,29.581 167.325,29.007 ; U200.2 167.325,29.007
  Bottom Layer w0.3: v1(163.373,39.37) 163.889,39.886 Cam300.21
"E32 RST": C102.2 M100.3 R104.1 S100.2 | length 34
  Top Layer w0.3: v1(146.482,66.294) C102.2 ; R104.1 147.193,46.812 v1(148.133,47.752) ; v1(148.133,51.511) 150.1,53.478 S100.2 150.1,60.579 150.292,60.579 150.292,61.671 v1(150.1,61.671) ; v1@150.196,61.767 150.686,62.257 150.686,63.056 150.826,63.196 150.826,64.372 151.765,65.311 151.765,68.593 152.197,69.025 M100.3
  Bottom Layer w0.3: v1(146.482,66.294) 146.482,65.289 v1(150.1,61.671) ; v1(148.133,47.752) v1(148.133,51.511)
GND: C100.1 C101.1 C102.1 C200.2 C201.1 C202.2 C203.2 C204.2 C205.2 C206.1 C207.2 C300.2 C301.1 C302.1 Cam300.10 Cam300.23 Cam300.MP1 Cam300.MP2 J201.5 J201.6 J201.7 J201.8 J201.9 J201.10 J201.11 J202.1 M100.1 M100.15 M100.38 M100.39 P100.1 P100.5 R302.2 S100.1 U100.4 U200.1 U201.1 U202.1 | length 40.9
  Top Layer w0.3: J201.11 141.698,25.978 142.16,25.973 ; U100.4@157.353,49.327 U100.4
  Top Layer w1: J201.10 J201.9 J201.8 ; v1(150.901,48.706) C101.1 152.525,48.706 153.111,49.292 153.635,49.292 v1(153.67,49.327) ; M100.39@158.82,62.23 M100.39@158.82,64.065 ; M100.39@158.82,65.9 M100.39@158.82,64.065 ; M100.39@160.655,62.23 M100.39@160.655,64.065 ; M100.39@160.655,65.9 M100.39@160.655,64.065 ; M100.39@162.49,62.23 M100.39@162.49,64.065 ; M100.39@162.49,65.9 M100.39@162.49,64.065 ; M100.39@158.82,64.065 M100.39@160.655,64.065 ; M100.39@160.655,64.065 M100.39@162.49,64.065
  Bottom Layer w0.3: v1(150.901,48.706) 151.389,48.218 Cam300.MP1 ; v1(160.122,36.449) R302.2@162.052,36.449 ; v1(164.846,44.323) 164.889,44.28 164.889,41.664 164.948,41.605 166.649,41.605 167.889,42.845 Cam300.MP2
  Bottom Layer w1: R302.2@162.052,36.449 C301.1
  other v1: 150.698,33.096 167.101,33.435 154.305,36.703 171.323,38.227 151.13,40.259 159.004,40.894 156.235,49.327 142,63.082 149.2,67.488
IO16: M100.27 P100.7 | length 18.3
  Top Layer w0.3: M100.27 171.196,57.595 172.667,56.124 176.276,56.124 176.551,55.849 176.551,54.377 175.281,53.107 175.084,53.107 174.477,52.5 174.477,52.303 174.473,52.299 174.473,47.111 P100.7
LED: D100.1 M100.9 | length 13.6
  Top Layer w0.3: v1(142.887,60.731) D100.1 ; v1(151.435,60.731) 152.108,61.405 M100.9
  Bottom Layer w0.3: v1(142.887,60.731) v1(151.435,60.731)
NetC207_1: C207.1 Q200.2 U200.3 U202.3 | length 39.3
  Top Layer w0.3: C207.1 168.068,39.624 ; Q200.2 168.087,39.643 168.068,39.624 ; U202.3 171.501,25.864 171.374,25.991 U200.3 166.929,25.991 165.541,27.379 165.541,36.129 162.954,38.717 161.036,38.717 160.782,38.971 160.782,39.802 161.519,40.538 167.154,40.538 168.068,39.624
NetC300_1: C300.1 Cam300.8 M100.36 | length 41.3
  Top Layer w0.3: v1(167.208,55.499) 166.357,56.351 166.357,66.599 168.783,69.025 M100.36
  Bottom Layer w0.3: C300.1 156.083,40.149 157.389,41.455 Cam300.8 157.389,45.6 156.293,46.696 156.293,47.955 161.754,53.416 165.125,53.416 v1(167.208,55.499)
NetCam300_3: Cam300.3 M100.31 | length 34.1
  Top Layer w0.3: v1(167.361,60.173) 167.609,60.421 167.609,61.158 168.638,62.186 169.208,62.186 169.208,62.675 M100.31
  Bottom Layer w0.3: Cam300.3 154.889,44.323 151.966,47.246 151.966,52.428 159.711,60.173 v1(167.361,60.173)
NetCam300_4: Cam300.4 M100.30 | length 32.3
  Top Layer w0.3: v1(168.199,60.604) 168.999,61.405 M100.30
  Bottom Layer w0.3: Cam300.4 155.389,44.842 152.412,47.819 152.412,51.193 160.299,59.08 167.64,59.08 168.199,59.639 v1(168.199,60.604)
NetCam300_5: Cam300.5 M100.33 | length 54.2
  Top Layer w0.3: v1(168.402,65.38) 168.567,65.215 M100.33
  Bottom Layer w0.3: Cam300.5 155.889,42.164 155.381,41.656 148.057,41.656 147.549,42.164 147.549,53.34 152.019,57.81 152.019,61.062 150.52,62.56 150.52,64.516 151.384,65.38 v1(168.402,65.38)
NetCam300_6: Cam300.6 M100.29 | length 30.7
  Top Layer w0.3: v1(168.758,59.487) 168.758,59.741 169.152,60.135 M100.29
  Bottom Layer w0.3: Cam300.6 156.389,44.55 152.839,48.1 152.839,50.44 152.841,50.443 152.841,50.458 153.179,50.796 153.194,50.796 156.831,54.432 163.703,54.432 v1(168.758,59.487)
NetCam300_11: Cam300.11 M100.6 | length 45.1
  Top Layer w0.3: v1(151.263,62.763) 151.253,62.773 151.253,63.885 152.04,64.672 152.062,64.672 152.605,65.215 M100.6
  Bottom Layer w0.3: v1(151.263,62.763) 151.32,62.706 151.526,62.706 151.591,62.641 167.13,62.641 169.763,60.008 169.763,56.98 158.889,46.106 Cam300.11
NetCam300_13: Cam300.13 M100.7 | length 55.9
  Top Layer w0.3: M100.7 154.241,63.945 v1(154.534,63.652)
  Bottom Layer w0.3: v1(154.534,63.652) 168.936,63.652 173.432,59.157 176.276,59.157 176.555,58.877 176.555,48.082 175.7,47.226 163.279,47.226 159.889,43.836 Cam300.13
NetCam300_16: Cam300.16 M100.37 | length 57
  Top Layer w0.3: v1(161.389,39.469) 161.867,39.947 163.627,39.947 163.95,39.624 163.95,39.123 168.222,34.851 170.69,34.851 177.405,41.566 177.405,64.124 171.234,70.295 M100.37
  Bottom Layer w0.3: v1(161.389,39.469) Cam300.16
NetCam300_17: Cam300.17 R302.1 | length 5
  Bottom Layer w0.3: Cam300.17 161.889,40.905 162.052,40.742 R302.1
NetCam300_18: Cam300.18 M100.10 | length 25.8
  Top Layer w0.3: M100.10 154.432,60.135 154.686,59.881 154.686,50.014 154.874,49.826 154.874,48.828 154.686,48.64 154.686,46.101 156.921,43.866 162.135,43.866 v1(162.389,44.12)
  Bottom Layer w0.3: Cam300.18 v1(162.389,44.12)
NetD100_2: D100.2 R112.2 | length 5.7
  Top Layer w0.3: D100.2 144.971,64.338 148.885,64.338 149.215,64.008 R112.2
NetJ200_2: J200.2 J201.1 | length 8
  Top Layer w0.3: J201.1 145.877,30.78
  Top Layer w1: 145.877,30.78 149.524,27.133 149.524,26.12 J200.2
NetM100_8: M100.8 R201.1 | length 36.2
  Top Layer w0.3: v1(151.83,63.218) 151.888,63.16 152.12,63.16 152.605,62.675 M100.8 ; R201.1 166.125,49.077 166.324,49.276 166.324,50.525 168.097,52.299 168.097,58.536 166.784,59.85 166.784,63.152 v1(167.894,64.262)
  Bottom Layer w0.3: v1(151.83,63.218) 151.888,63.275 151.888,63.674 152.476,64.262 v1(167.894,64.262)
NetQ200_1: Q200.1 R200.1 R201.2 | length 7.7
  Top Layer w0.3: R201.2 166.878,46.427 167.331,45.974 R200.1 169.022,45.179 169.304,44.897 ; 169.305,44.896 169.392,44.41 169.987,43.815 Q200.1
NetR103_1: R103.1 U100.1 | length 28.8
  Top Layer w0.3: R103.1 143.398,43.881 149.736,50.219 v1(153.418,50.219) ; v1(159.664,52.299) 159.309,51.943 159.309,49.022 159.461,48.87 161.036,48.87 161.163,48.997 U100.1
  Bottom Layer w0.3: v1(153.418,50.219) 153.424,50.213 154.168,50.213 154.318,50.063 157.429,50.063 v1(159.664,52.299)
"PSRAM CLK": M100.28 U100.6 | length 23
  Top Layer w0.3: U100.6 158.623,46.203 160.325,47.904 167.132,47.904 167.996,48.768 167.996,51.511 168.859,52.375 168.859,58.687 169.037,58.865 M100.28
SD0: M100.21 U100.2 | length 6.5
  Top Layer w0.3: U100.2 159.893,51.096 160.943,52.146 162.747,52.146 163.56,52.959 M100.21@163.56,54.055
SD1: M100.22 U100.5 | length 12.2
  Top Layer w0.3: U100.5 157.353,46.584 v1(157.937,47.168) ; v1(164.135,52.629) 164.465,52.959 M100.22@164.83,54.055
  Bottom Layer w0.3: v1(157.937,47.168) 158.674,47.168 v1(164.135,52.629)
SD2: M100.17 U100.7 | length 15.8
  Top Layer w0.3: M100.17@158.48,54.055 158.48,52.984 158.039,52.543 158.039,48.768 158.471,48.336 162.23,48.336 v1(162.839,48.946) ; U100.7 159.893,46.431 v1(160.452,46.558)
  Bottom Layer w0.3: v1(160.452,46.558) v1(162.839,48.946)
SD3: M100.18 U100.3 | length 4.6
  Top Layer w0.3: U100.3 158.623,52.195 159.316,52.889 159.75,52.889 M100.18@159.75,54.055
"TWI SCK": Cam300.20 M100.12 R110.1 | length 33.6
  Top Layer w0.3: R110.1 148.427,42.204 149.29,42.204 152.527,45.441 ; M100.12 152.146,57.595 151.867,57.316 151.867,53.021 154.247,50.64 154.247,49.849 154.447,49.649 154.447,49.005 154.247,48.805 154.247,47.161 152.527,45.441 ; v1(163.093,43.586) 162.941,43.434 156.413,43.434 154.407,45.441 152.527,45.441
  Bottom Layer w0.3: v1(163.093,43.586) 163.389,43.291 Cam300.20
"TWI SDA": Cam300.22 M100.11 R111.1 | length 65.8
  Top Layer w0.3: v1(143.408,44.983) 143.728,45.303 R111.1 144.141,46.612 151.232,53.703 151.232,58.459 151.638,58.865 M100.11
  Bottom Layer w0.3: v1(143.408,44.983) 141.224,44.983 140.665,44.425 140.665,36.703 143.688,33.68 164.998,33.68 166.853,35.535 166.853,39.091 164.389,41.554 Cam300.22
U0RXD: M100.34 P100.3 | length 14.8
  Top Layer w0.3: v1(168.631,62.763) 168.631,64.364 168.199,64.795 168.148,64.795 167.818,65.126 167.818,65.647 168.656,66.485 M100.34
  Bottom Layer w0.3: v1(168.631,62.763) 173.307,58.087 P100.3@175.514,58.087
U0TXD: M100.35 P100.2 | length 9.7
  Top Layer w0.3: M100.35 171.552,67.755 174.473,64.834 174.473,62.128 P100.2@175.514,61.087
pads on no net: Cam300.1 Cam300.2 Cam300.24 J201.2 J201.3 J201.4 M100.13 M100.14 M100.16 M100.19 M100.20 M100.23 M100.24 M100.26 M100.32 P100.MH1 P100.MH2 U201.4

## Polygon pours and split planes (outlines as drawn)
GND on Bottom Layer "GND_L02_P003" (solid, pour order 3): 180.721,74.676 138.557,74.676 138.303,74.93 136.271,72.898 136.271,22.479 179.705,22.479 180.721,21.463
GND on Top Layer "GND_L01_P002" (solid, pour order 2): 180.467,74.168 179.705,74.93 138.43,74.93 138.43,20.828 182.118,20.828

## Text inside footprints (layer, text, board x,y; h text height)
J201: Board Shape "PCB EDGE" at 140.335,36.703 h0.7 r270